# Altium PCB PCB1.PcbDoc
Units mil, origin at the board's own origin, x right, y up, seen from the top; angles counter-clockwise.
Board outline 1600 x 2000 mil, 2 copper layers (Top Layer, Bottom Layer), stack 64.41 mil thick; 23 components, 27 nets, 96 pads, 32 vias.
Unrouted connection lines stored in the file: 14.
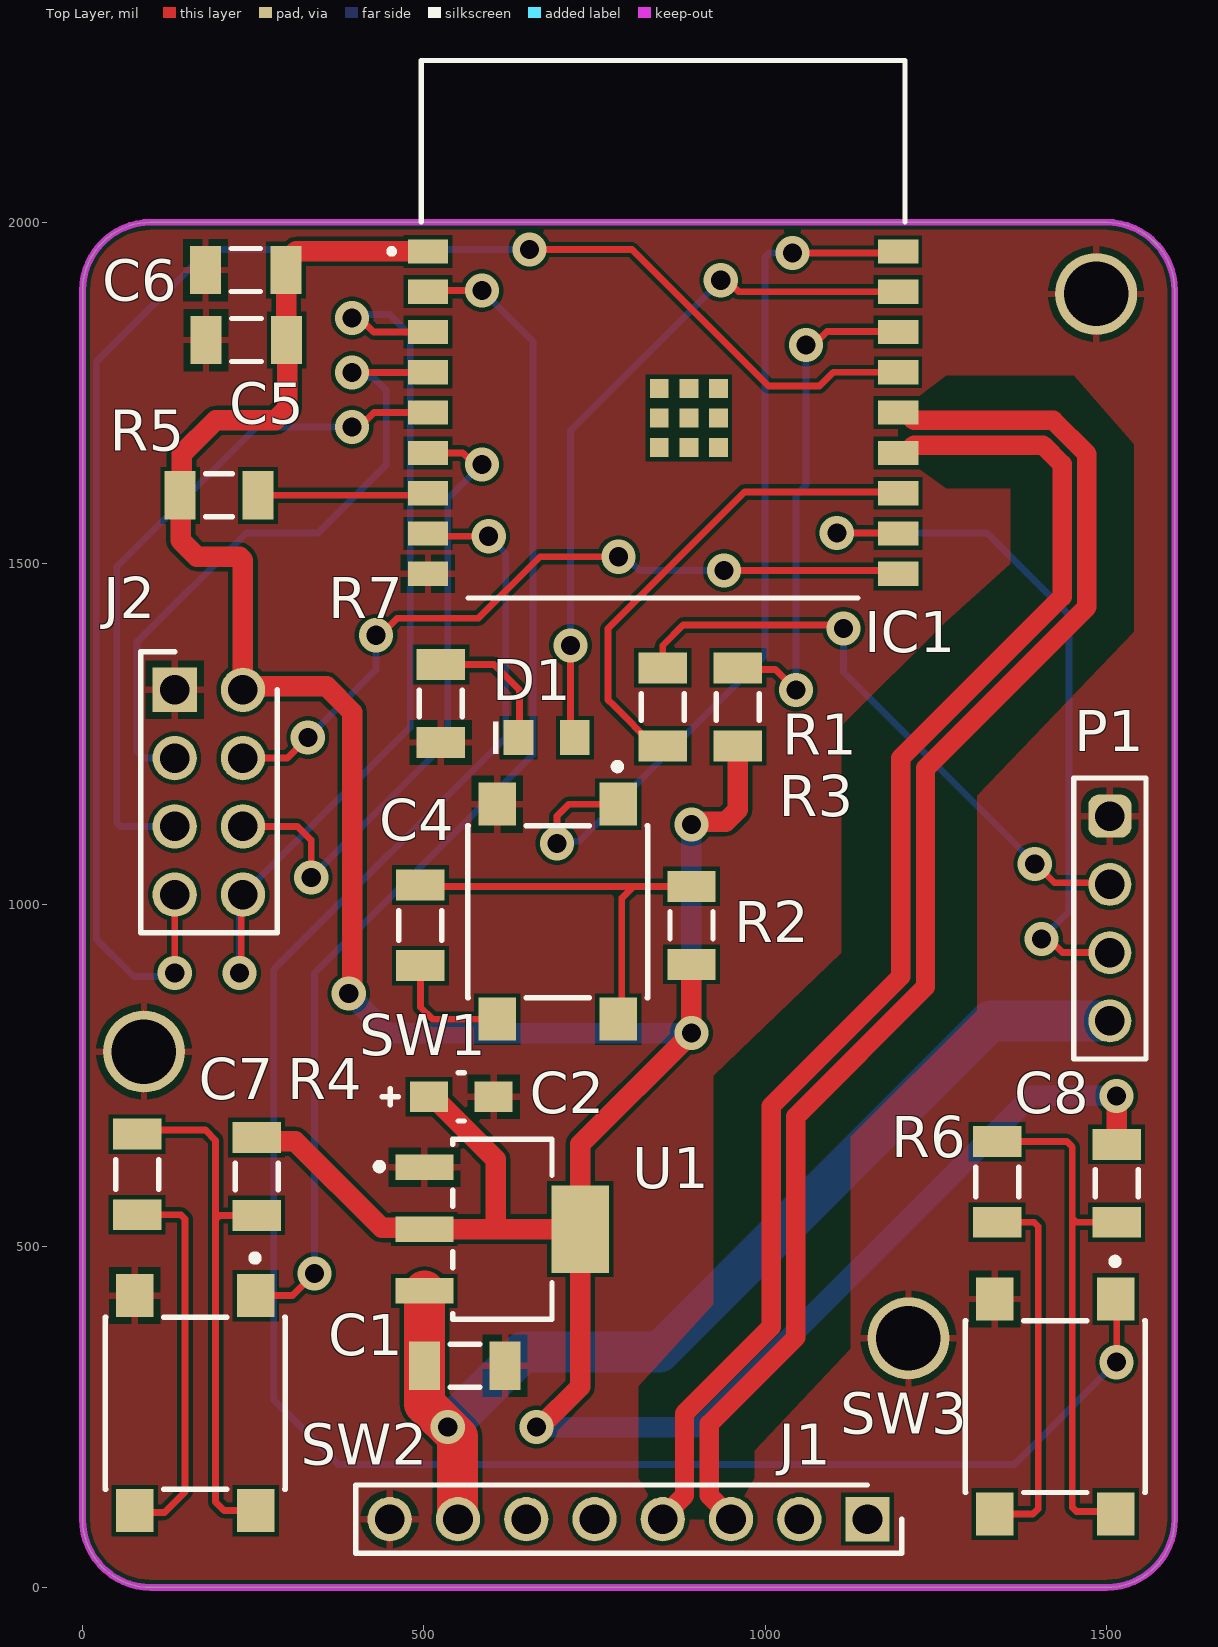
[diagram p0: Top Layer view]
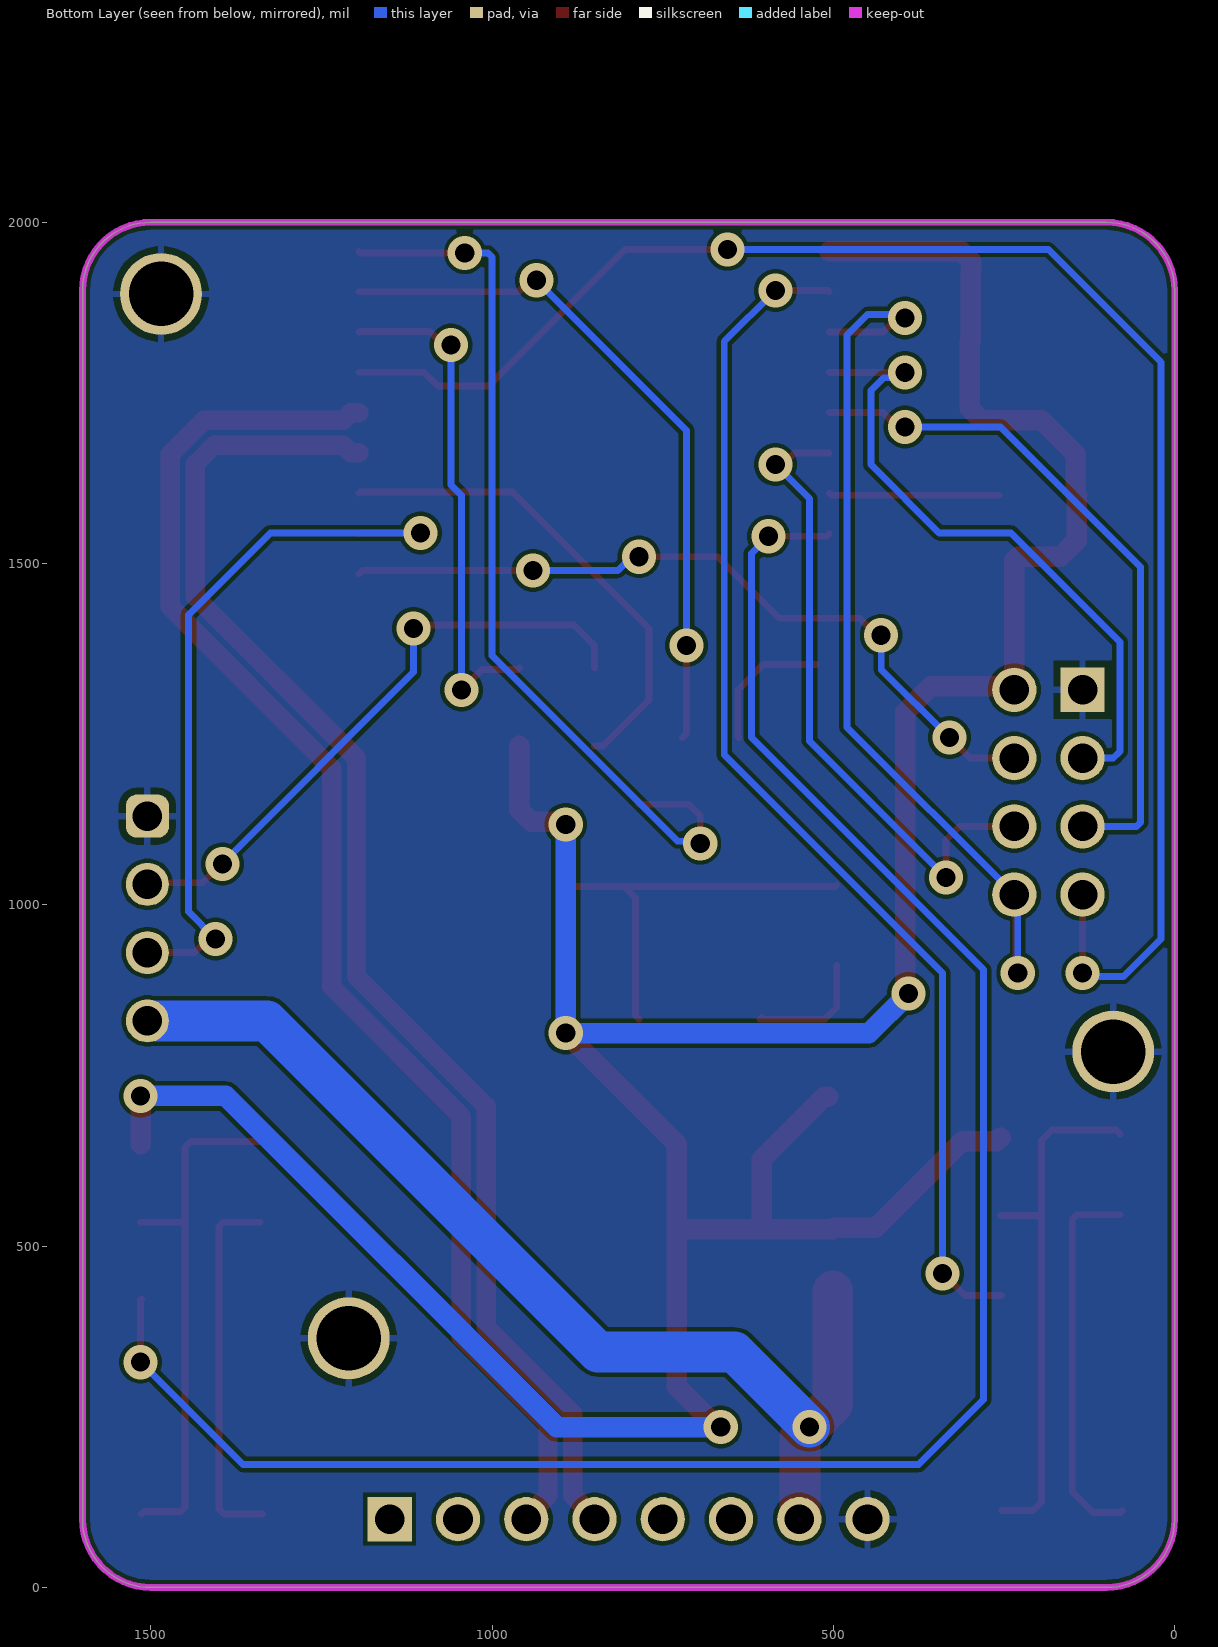
[diagram p1: Bottom Layer view, seen from below]

## Layer stack, top to bottom
Top Solder: solder mask 0.984, Solder Resist, Dk 3.6
Top Layer: signal copper 1.693
Dielectric 1: dielectric 61.024, FR-4, Dk 4.4
Bottom Layer: signal copper 1.693
Bottom Solder: solder mask 0.984, Solder Resist, Dk 3.6

## Board outline
100,0 cw(c100,100) 0,100 0,1900 cw(c100,1900) 100,2000 525,2000 1500,2000 cw(c1500,1900) 1600,1900 1600,100 cw(c1500,100) 1500,0

## Design rules (kind name [scope] priority, off if disabled: settings)
Clearance [All] p1: gap=6 ignorepadtopadclearanceinfootprint=FALSE
DiffPairsRouting [All] p1: maxlimit=7.9 minlimit=7.9 mostfreqgap=7.9 toplayer_minwidth=28.41 toplayer_maxwidth=28.41 toplayer_prefwidth=28.41 bottomlayer_minwidth=28.41 bottomlayer_maxwidth=28.41 bottomlayer_prefwidth=28.41 impedanceprofiledriven=TRUE impedanceprofileid={79272254-0E5F-4545-87E0-84537C7F344B} impedanceprofilevalue=90.000000 maxuncoupledlength=500
MinimumSolderMaskSliver [All] p1: minsoldermaskwidth=6
PolygonConnect [All] p1: connectstyle=Relief reliefconductorwidth=10 reliefentries=4 polygonreliefangle="90 Angle" airgapwidth=10
RoutingVias [All] p1: holewidth=28 width=50 viastyle="Through Hole" minholewidth=28 minwidth=50 maxholewidth=28 maxwidth=50
SilkToSolderMaskClearance [IsPad] p1: minsilkscreentomaskgap=7.5 clearancetoexposedcopper=TRUE
SolderMaskExpansion [All] p1: expansion=4 istentingtop=FALSE
Width [All] p1: maxlimit=60 minlimit=7.9 preferedwidth=30
27 further rules are at their usual default settings.

## Classes and differential pairs
differential pair USB_D: +USB_D_P -USB_D_N

## Components (designator, comment, footprint, x,y, rotation, side; value= is the part's Value field where it differs from the comment)
C1 "10uF" C1206 560,325 r180 top
C2 "T491A106K020AT" FP-T491A106K020AT-MFG 555,718.87 r180 top
C4 "100nF" C1206 495,970 r90 top
C5 "10uF" C1206 240,1827.47 r0 top
C6 "100nF" C1206 239.06,1930 r0 top
C7 "100nF" C1206 80,605 r90 top
C8 "100nF" C1206 1340,594.06 r90 top
D1 "150080VS75000" WL-SMCW_0805_150080xx75000 680,1245 r0 top
IC1 "ESP32-C3-WROOM-02-N4" ESP32C3WROOM02N4 888.3,1713.31 r0 top
J1 "SLW-108-01-G-S" RHDR8W64P0X254_1X8_2032X254X457P 1150,100 r180 top
J2 "2213S-08G" HDRV8W64P254_2X4_1016X508X874P 135,1315 r270 top
P1 "61300411121" 61300411121 1505,980 r270 top
R1 "10k" R1206 960,1290 r270 top
R2 "4k7" R1206 892.07,970 r270 top
R3 "470" R1206 850,1290 r270 top
R4 "4k7" R1206 255,602.09 r90 top
R5 "10k" R1206 200,1600 r0 top
R6 "4k7" R1206 1515,592.09 r90 top
R7 "1K" R1206 525,1295 r90 top
SW1 "B3FS-1000P" FP-B3FS-1000P-MFG 696.03,990 r90 top
SW2 "B3FS-1000P" FP-B3FS-1000P-MFG 165,270 r90 top
SW3 "B3FS-1000P" FP-B3FS-1000P-MFG 1425,265 r90 top
U1 "TLV1117-33IDCYR" FP-DCY0004A-MFG 615,525 r0 top

## Footprints (in the part's own frame and the unit in brackets; to place one, negate y for a bottom-side part, rotate by r counter-clockwise, add the part's x,y. Pads: shape width x height; smd on the part's side, far side on the other; paste and mask are expansions set on the pad)
61300411121 [mm] "Pin Header, pitch 2.54 mm, THT, Vertical, single row, 4p"
  rrect50% 1.6x1.6 hole 1.1: 1(-3.81,0)
  round 1.6 hole 1.1: 2(-1.27,0) 3(1.27,0) 4(3.81,0)
  silkscreen extent -5.23,-1.35 5.23,1.35, body extent -5.08,-1.27 5.08,1.27, height 8.57
C1206 [mm] "Chip Capacitor, Body 3.2x1.6mm, Height 1.7mm, IPC Medium Density"
  rect 1.15x1.8 smd: 1(-1.5,0) 2(1.5,0)
  silkscreen extent -0.55,-0.8 0.55,0.8, body extent -1.7,-0.9 1.7,0.9, height 1.7
ESP32C3WROOM02N4 [mm]
  rect 1.5x0.9 smd: 1(-9.71,6.2) 2(-9.71,4.7) 3(-9.71,3.2) 4(-9.71,1.7) 5(-9.71,0.2) 6(-9.71,-1.3) 7(-9.71,-2.8) 8(-9.71,-4.3) 9(-9.71,-5.8) 10(7.79,-5.8) 11(7.79,-4.3) 12(7.79,-2.8) 13(7.79,-1.3) 14(7.79,0.2) 15(7.79,1.7) 16(7.79,3.2) 17(7.79,4.7) 18(7.79,6.2)
  rect 0.7x0.7 smd: 19(0,0) 20(1.1,0) 21(1.1,1.1) 22(0,1.1) 23(-1.1,1.1) 24(-1.1,0) 25(-1.1,-1.1) 26(0,-1.1) 27(1.1,-1.1)
  silkscreen extent -11.16,-6.7 8.04,13.3, body extent -10.31,-6.7 7.69,13.3, height 3.2
FP-B3FS-1000P-MFG [mm]
  rect 1.6x1.4 smd paste+0 mask+0: 1(4,-2.25) 2(-4,-2.25) 3(4,2.25) 4(-4,2.25)
  silkscreen extent -3.2,-3.35 5.52,3.35, body extent -4.9,-3.45 4.9,3.45, height 0.25
FP-DCY0004A-MFG [mm]
  rect 2.15x0.95 smd paste+0 mask+0: 1(-2.9,2.3) 2(-2.9,0) 3(-2.9,-2.3)
  rect 2.15x3.25 smd paste+0 mask+0: 4(2.9,0)
  silkscreen extent -4.7,-3.35 1.85,3.35, body extent -4.08,-3.45 4.08,3.45, height 0.25
FP-T491A106K020AT-MFG [mm]
  rect 1.42x1.13 smd paste+0 mask+0: 1(-1.2,0) 2(1.2,0)
  silkscreen extent -0.12,-0.9 2.95,0.9, body extent -2.03,-1.02 2.03,1.02, height 0.25
HDRV8W64P254_2X4_1016X508X874P [mm]
  rect 1.65x1.65 hole 1.1: 1(0,0)
  round 1.65 hole 1.1: 2(0,2.54) 3(2.54,0) 4(2.54,2.54) 5(5.08,0) 6(5.08,2.54) 7(7.62,0) 8(7.62,2.54)
  silkscreen extent -1.42,-1.27 9.04,3.81, body extent -1.27,-1.27 8.89,3.81, height 8.74
R1206 [mm] "Chip Resistor, Body 3.2x1.6mm, IPC Medium Density"
  rect 1.15x1.8 smd: 1(-1.45,0) 2(1.45,0)
  silkscreen extent -0.5,-0.8 0.5,0.8, body extent -1.67,-0.87 1.67,0.87, height 0.75
RHDR8W64P0X254_1X8_2032X254X457P [mm]
  rect 1.65x1.65 hole 1.1: 1(0,0)
  round 1.65 hole 1.1: 2(2.54,0) 3(5.08,0) 4(7.62,0) 5(10.16,0) 6(12.7,0) 7(15.24,0) 8(17.78,0)
  silkscreen extent -1.27,-1.27 19.05,1.27, body extent -1.27,-1.27 19.05,1.27, height 4.57
WL-SMCW_0805_150080xx75000 [mm] "SMD Mono-color Chip LED, body 2.0x1.25mm"
  rect 1.1x1.3 smd: 1(-1.05,0) 2(1.05,0)
  silkscreen extent -2,-0.6 -1.8,0.6, body extent -1,-0.63 1,0.62, height 0.7

## Part data
C1 C4 C5 C6 C7 C8: library part Capacitor_1206, "SMD Capacitor 1206", LatestRevisionDate=03-11-2016, LatestRevisionNote=Creation, PackageDescription="Chip Capacitor, Body 3.2x1.6mm, Height 1.7mm, IPC Medium Density", PackageReference=C1206, Published=03-11-2016, Publisher=Windesheim
C2: library part CMP-03017-000050-1, "CAP TANT 10UF 10% 20V 1206", Capacitance=1E-05F, Case/Package=3216-18, Tolerance=10%, Height=1.6mm, Lead Free="Lead Free", Length=3.2mm, RoHS Compliant=Yes, Width=1.6mm
D1: library part CMP-1426-00009-5, Case Code (Imperial)=0805, Case Code (Metric)=2012, Color=Green, Forward Current=100mA, Forward Voltage=2V, Max Junction Temperature (Tj)=95°C, Max Operating Temperature=85°C, Max Reverse Voltage (DC)=5V, Min Operating Temperature=-40°C, Power Dissipation=72mW, Test Current=20mA, Case/Package=0805, Dominant Wavelength=570nm, Height=700µm, Length=2mm, Lens Style="Clear, Rectangular", Luminous Intensity=40mcd, Mount="Surface Mount", NexarPartId=29717783, Packaging="Tape and Reel", Peak Wavelength=572nm, REACH SVHC=Unknown, Reverse Voltage=5V, RoHS=Compliant, Viewing Angle=140°, Wavelength=570nm, Width=1.25mm
IC1: "Integrated Circuit", Manufacturer_Name="Espressif Systems", Mouser Part Number=356-ESP32C3WROOM02N4, Datasheet Link=https://www.mouser.ch/datasheet/2/891/Espressif_ESP32_C3_WROOM_02-2006871.pdf, Height=3.35mm, Manufacturer_Part_Number=ESP32-C3-WROOM-02-N4, Mouser Price/Stock=https://www.mouser.co.uk/ProductDetail/Espressif-Systems/ESP32-C3-WROOM-02-N4?qs=stqOd1AaK7%2FqjTZKEOgfUg%3D%3D
J1: "Connector", Manufacturer_Name=SAMTEC, Mouser Part Number=200-SLW10801GS, Arrow Part Number=SLW-108-01-G-S, Arrow Price/Stock=https://www.arrow.com/en/products/slw-108-01-g-s/samtec, Datasheet Link=http://suddendocs.samtec.com/prints/slw-1xx-01-x-x-mkt.pdf, Height=4.57mm, Manufacturer_Part_Number=SLW-108-01-G-S, Mouser Price/Stock=https://www.mouser.com/Search/Refine.aspx?Keyword=200-SLW10801GS
J2: "Connector", Manufacturer_Name=MULTICOMP, Datasheet Link=http://www.farnell.com/datasheets/1697533.pdf, Height=8.74mm, Manufacturer_Part_Number=2213S-08G
P1: library part CMP-1502-01064-2, Color=Black, Contact Resistance=20mΩ, Current Rating=3A, Max Operating Temperature=105°C, Min Operating Temperature=-40°C, Operating Supply Voltage=250V, Connector Type="Male Pin", Contact Material=Copper, Contact Mating Length=5.9944mm, Contact Plating=Gold, Gender=Male, Height=8.89mm, Lead Free="Lead Free", Lead Pitch=2.54mm, Mount="Through Hole", NexarPartId=32855522, Number of Contacts=4, Number of Pins=4, Number of Positions=4, Number of Rows=1, Orientation=Vertical, Packaging=Bulk, Pitch=2.54mm, REACH SVHC=Unknown, RoHS=Compliant, Termination=Solder, Voltage Rating=250V
R1 R2 R3 R4 R5 R6 R7: library part Resistor_1206, "SMD Resistor 1206", LatestRevisionDate=03-11-2016, LatestRevisionNote=Creation, PackageDescription="Chip Resistor, Body 3.2x1.6mm, IPC Medium Density", PackageReference=R1206, Published=03-11-2016, Publisher=Windesheim
SW1 SW2 SW3: library part CMP-08834-000003-2, "SWITCH TACTILE SPST-NO 0.05A 24V", Actuator Color=Black, Case/Package=SMD/SMT, Contact Current Rating=50mA, Contact Resistance=100mR, Max Operating Temperature=70°C, Max Voltage Rating (DC)=24V, Min Operating Temperature=-25°C, Operating Force=0.98N, Package Quantity=1, Ratings=IP00, Actuator Length=0.5mm, Actuator Type=Standard, Contact Material=Silver, Contact Plating=Silver, Current Rating=50mA, Depth=8mm, Electrical Life=1000000Cycles, Illumination Type=Non-Illuminated, Lead Free="Lead Free", Length=6.3mm, Material=Plastic, Max Current Rating=50mA, Mechanical Life=1000000Cycles, Mount="Surface Mount", Number of Poles=1, Orientation=Straight, Packaging="Tape and Reel", Series=B3FS, Switch Function=Off-Mom, Switch Travel=0.25mm, Termination="Gull Wing", Throw Configuration=SPST, Voltage Rating (DC)=24V, Weight=0.2g
U1: library part CMP-04917-000056-1, "IC REG LIN 3.3V 800MA SOT223-4", Dropout Voltage=1.2V, Manufacturer="Texas Instruments", Max Junction Temp=+125°C, Max Supply Voltage=15V, Min Supply Voltage=4.7V, Nominal Supply Current=5mA, Output Current=0.8A, Output Voltage=3.3V, Package=DCY0004A, Temperature="-40°C to +125°C", Temperature Range Low=-40°C, Automotive=No, Category=IC, ComponentLink2Description=Datasheet, ComponentLink2URL=http://www.ti.com/lit/ds/symlink/tlv1117.pdf, Device Class L1="Integrated Circuits (ICs)", Device Class L2="Power Management ICs", Device Class L3="Voltage Regulators - Linear", Digikey Description="IC REG LIN 3.3V 800MA SOT223-4", Height=1.8mm, Lead Free=Yes, Manufacturer Part Number=TLV1117-33IDCYR, Mouser Description="LDO Voltage Regulators Fixed LDO Volt Reg", Number Of Outputs=1, Octopart=https://octopart.com/tlv1117-33idcyr-texas+instruments-669250, Output Type=Fixed, RoHS=TRUE, Standoff Height=0.02mm, Temperature Range High=+125°C

## Free pads (board coordinates)
  round 120 hole 94.49 paste-99999: MH1(1485,1895)
  round 120 hole 94.49 mask+4: MH2(90,785) MH3(1210,365)

## Via types
v1: diameter 50, hole 28, Top Layer to Bottom Layer, 32 vias

## Nets (pads, with @x,y where several pads share a name; then routed paths per layer and width w, separated by ;. In a path a pad name is that pad's centre, name@x,y a point inside that pad or via, vN(x,y) a via of type N, cw(c..) or ccw(c..) an arc to the next point about the centre after c; other vN are vias at no path point)
+3V3: C2.2 C5.2 C6.2 IC1.1 J2.2 R1.2 R2.2 R4.2 R5.1 R6.2 U1.2 U1.4 | length 5291.6
  Top Layer w30: R4.2 260.44,653.73 311.27,653.73 438.08,526.92 498.91,526.92 U1.2 605,525 ; C5.2@298.58,1827.47 298.58,1929.53 C6.2 298.11,1942.8 312.72,1957.4 IC1.1 ; C5.2 300,1826.53 300,1727.57 282.43,1710 195,1710 145,1660 145,1602.09 R5.1 143.79,1599.13 143.79,1533.79 167.57,1510 230,1510 235,1505 J2.2 240,1320 357.43,1320 395,1282.43 395,889.14 393.83,887.97 393.83,873.83 v1(390,870) ; C2.2 513.46,718.87 605,627.33 605,525 ; v1(665,235) 670,235 729.17,294.17 U1.4 ; R2.2 v1(892.07,812.07) 729.17,649.17 U1.4 ; v1(892.07,1117.93) 895.89,1121.76 942.43,1121.76 960,1139.33 R1.2 ; R6.2 v1(1515,720) ; 605,525 U1.4
  Bottom Layer w30: v1(390,870) 447.93,812.07 v1(892.07,812.07) v1(892.07,1117.93) ; v1(665,235) 905,235 1390,720 v1(1515,720)
+5V: C1.2 J1.7 P1.4 U1.3 | length 1571.1
  Top Layer w60: U1.3@500.94,434.33 500.94,269.06 549.05,220.95 549.05,100.95 J1.7
  Bottom Layer w60: v1(535,235) 645,345 845,345 1330,830 P1.4
BOOT_SL: IC1.8 SW3.1 | length 2936.4
  Top Layer w10: IC1.8 510.03,1540 v1(595,1540) ; SW3.1 1515,421.06 v1(1515,330)
  Bottom Layer w10: v1(595,1540) 620,1515 620,1245 280,905 280,275 375,180 1365,180 v1(1515,330)
CHIP_EN: IC1.2 SW2.1 | length 1783.2
  Top Layer w10: SW2.1 307.48,427.48 v1(340,460) ; IC1.2 507.67,1900 v1(585,1900)
  Bottom Layer w10: v1(340,460) 340,900 660,1220 660,1825 v1(585,1900)
FSPI_CLK: IC1.5 J2.5 | length 1011.3
  Top Layer w10: v1(395,1700) 405.82,1700 427.01,1721.18 IC1.5
  Bottom Layer w10: J2.5 55.86,1115 50,1120.86 50,1495 255,1700 v1(395,1700)
FSPI_CSN: IC1.10 J2.4 | length 1121.8
  Top Layer w10: J2.4 300,1215 v1(330,1245) ; v1(430,1395) 436.57,1395 461.57,1420 580,1420 670,1510 v1(785,1510) ; v1(940,1490) 1189.95,1490 IC1.10
  Bottom Layer w10: v1(330,1245) 430,1345 v1(430,1395) ; v1(785,1510) 795.82,1510 815.82,1490 v1(940,1490)
FSPI_D: IC1.6 J2.6 | length 957.9
  Top Layer w10: J2.6 315,1115 335,1095 v1(335,1040) ; IC1.6 557.05,1662.13 574.18,1645 v1(585,1645)
  Bottom Layer w10: v1(335,1040) 535,1240 535,1595 v1(585,1645)
FSPI_Q: IC1.15 J2.7 | length 2434.4
  Top Layer w10: v1(135,900) J2.7 ; v1(655,1960) 805,1960 1005,1760 1079.53,1760 1099.76,1780.24 IC1.15
  Bottom Layer w10: v1(135,900) 130,895 75,895 20,950 20,1795 185,1960 v1(655,1960)
GDO0_TX: IC1.3 J2.8 | length 1352.8
  Top Layer w10: v1(230,900) 232.5,902.5 232.5,1012.5 J2.8 ; v1(395,1860) 405.82,1860 426.53,1839.29 IC1.3
  Bottom Layer w10: v1(230,900) J2.8@230,995.13 ; J2.8 480,1260 480,1835 450,1865 400,1865 v1(395,1860)
GDO2_RX: IC1.4 J2.3 | length 972.4
  Top Layer w10: v1(395,1780) 505.78,1780 IC1.4
  Bottom Layer w10: J2.3 90,1215 80,1225 80,1385 240,1545 345,1545 445,1645 445,1753.43 426.09,1772.35 402.65,1772.35 v1(395,1780)
GND: C1.1 C2.1 C5.1 C6.1 IC1.9 J1.8 J2.1 P1.1 pad.MH1 pad.MH2 pad.MH3 R7.1 SW1.3 SW2.3 SW3.3 U1.1
NetC4_1: C4.1 SW1.4 | length 184.1
  Top Layer w10: C4.1 495,850 512.48,832.52 SW1.4 SW1.4@604.97,835
NetC4_2: C4.2 R2.1 SW1.2 | length 601.8
  Top Layer w10: C4.2 496.97,1027.09 807.09,1027.09 ; SW1.2 790,837.9 790,1010 807.09,1027.09 ; R2.1 807.09,1027.09
NetC7_1: C7.1 SW2.4 | length 559.5
  Top Layer w10: SW2.4 78.94,110 120,110 150,140 150,540 144.06,545.94 C7.1
NetC7_2: C7.2 R4.1 SW2.2 | length 779.9
  Top Layer w10: C7.2 85.94,670 180,670 195,655 195,539.14 ; SW2.2 207.48,112.52 195,125 195,539.14 ; R4.1 200.86,545 195,539.14
NetC8_1: C8.1 SW3.4 | length 543.2
  Top Layer w10: SW3.4 1392.52,107.52 1400,115 1400,529.14 1394.14,535 C8.1
NetC8_2: C8.2 R6.1 SW3.2 | length 776.1
  Top Layer w10: C8.2 1441.89,653.11 1450,645 1450,540.86 ; SW3.2 1509.65,111.46 1455.86,111.46 1450,117.31 1450,540.86 ; R6.1 1455.86,535 1450,540.86
NetD1_1: D1.1 R7.2 | length 200.9
  Top Layer w10: R7.2 602.91,1352.09 640,1315 640,1246.34 D1.1
NetD1_2: D1.2 IC1.17 | length 1030.6
  Top Layer w10: v1(715,1380) 715,1251.34 D1.2 ; v1(935,1915) 944.2,1915 960.86,1898.35 IC1.17
  Bottom Layer w10: v1(715,1380) 715,1695 v1(935,1915)
NetIC1_7: IC1.7 R5.2 | length 250.2
  Top Layer w10: R5.2 502.95,1600 IC1.7
NetIC1_12: IC1.12 R3.2 | length 721.4
  Top Layer w10: R3.2 837.2,1232.91 777.65,1292.46 770,1300.12 770,1320 770,1405 970,1605 1193.06,1605 IC1.12
NetIC1_16: IC1.16 R1.1 | length 753.1
  Top Layer w10: R1.1 962.09,1345 1015,1345 v1(1045,1315) ; v1(1060,1820) 1070.82,1820 1090.82,1840 1194.28,1840 IC1.16
  Bottom Layer w10: v1(1045,1315) 1045,1600 1060,1615 v1(1060,1820)
SW1: IC1.18 SW1.1 | length 1338.3
  Top Layer w10: v1(695,1090) 695,1130 712.48,1147.48 SW1.1 ; v1(1040,1955) 1192.59,1955 IC1.18
  Bottom Layer w10: v1(695,1090) 698.28,1093.28 728.28,1093.28 1000,1365 1000,1949.14 1005.86,1955 v1(1040,1955)
U0RXD: IC1.11 P1.3 | length 1080
  Top Layer w10: v1(1105,1545) 1194.01,1545 IC1.11 ; v1(1405,950) 1415.82,950 1435.82,930 P1.3
  Bottom Layer w10: v1(1105,1545) 1325,1545 1445,1425 1445,990 v1(1405,950)
U0TXD: P1.2 R3.1 | length 895
  Top Layer w10: R3.1 850,1380 880,1410 1110,1410 v1(1115,1405) ; v1(1395,1060) 1396.38,1060 1423.98,1032.41 1502.59,1032.41 P1.2
  Bottom Layer w10: v1(1115,1405) 1115,1340.85 v1@1395,1060.85
USB_D_N: IC1.13 J1.4 | length 2044.1
  Top Layer w28.41: J1.4 850,103.07 881.84,134.92 881.84,254.73 1008.69,381.58 1008.69,705.04 1198.69,895.04 1198.69,1215.04 1435,1451.35 1435,1645.48 1406.99,1673.5 1218.18,1673.5 1206.8,1662.13 IC1.13
USB_D_P: IC1.14 J1.3 | length 2104.3
  Top Layer w28.41: J1.3 950,103.07 918.16,134.92 918.16,239.69 1045,366.54 1045,690 1235,880 1235,1200 1471.31,1436.31 1471.31,1660.52 1422.03,1709.81 1218.18,1709.81 1206.8,1721.18 IC1.14
pads on no net: IC1.19 IC1.20 IC1.21 IC1.22 IC1.23 IC1.24 IC1.25 IC1.26 IC1.27 J1.1 J1.2 J1.5 J1.6

## Polygon pours and split planes (outlines as drawn)
GND on Top Layer "GND_L01_P000" (solid, pour order 0): 100,0 cw(c100,100) 0,100 0,1900 cw(c100,1900) 100,2000 525,2000 1500,2000 cw(c1500,1900) 1600,1900 1600,100 cw(c1500,100) 1500,0
GND on Bottom Layer "GND_L02_P001" (solid, pour order 1): 100,0 cw(c100,100) 0,100 0,1900 cw(c100,1900) 100,2000 525,2000 1500,2000 cw(c1500,1900) 1600,1900 1600,100 cw(c1500,100) 1500,0

## Keep-outs
Keep-Out Layer:
  lines w10: 100,2000 ccw(c100,2000) 100,2000 ; 100,2000 ccw(c100,1900) 0,1900 0,100 ccw(c100,100) 100,0 1500,0 ccw(c1500,100) 1600,100 1600,1900 ccw(c1500,1900) 1500,2000 525,2000 100,2000

## Other copper
Top Layer:
  pour cut-out: 850,100 815,160 815,295 925,415 925,750 1112.5,930 1112.5,1262.5 1265,1415 1360,1500 1360,1610 1265,1610 1194.99,1662.13 1194.99,1721.18 1265,1775 1452,1775 1540,1675 1540,1400 1310,1160 1310,845 1125,660 1125,350 984.12,200 984.12,160 950,100